# Altium PCB FlyBack.PcbDoc
Units mm, origin at the board's own origin, x right, y up, seen from the top; angles counter-clockwise.
Board outline 100 x 100 mm, 2 copper layers (Top Layer, Bottom Layer); 36 components, 23 nets, 113 pads, 0 vias.
Unrouted connection lines stored in the file: 1.
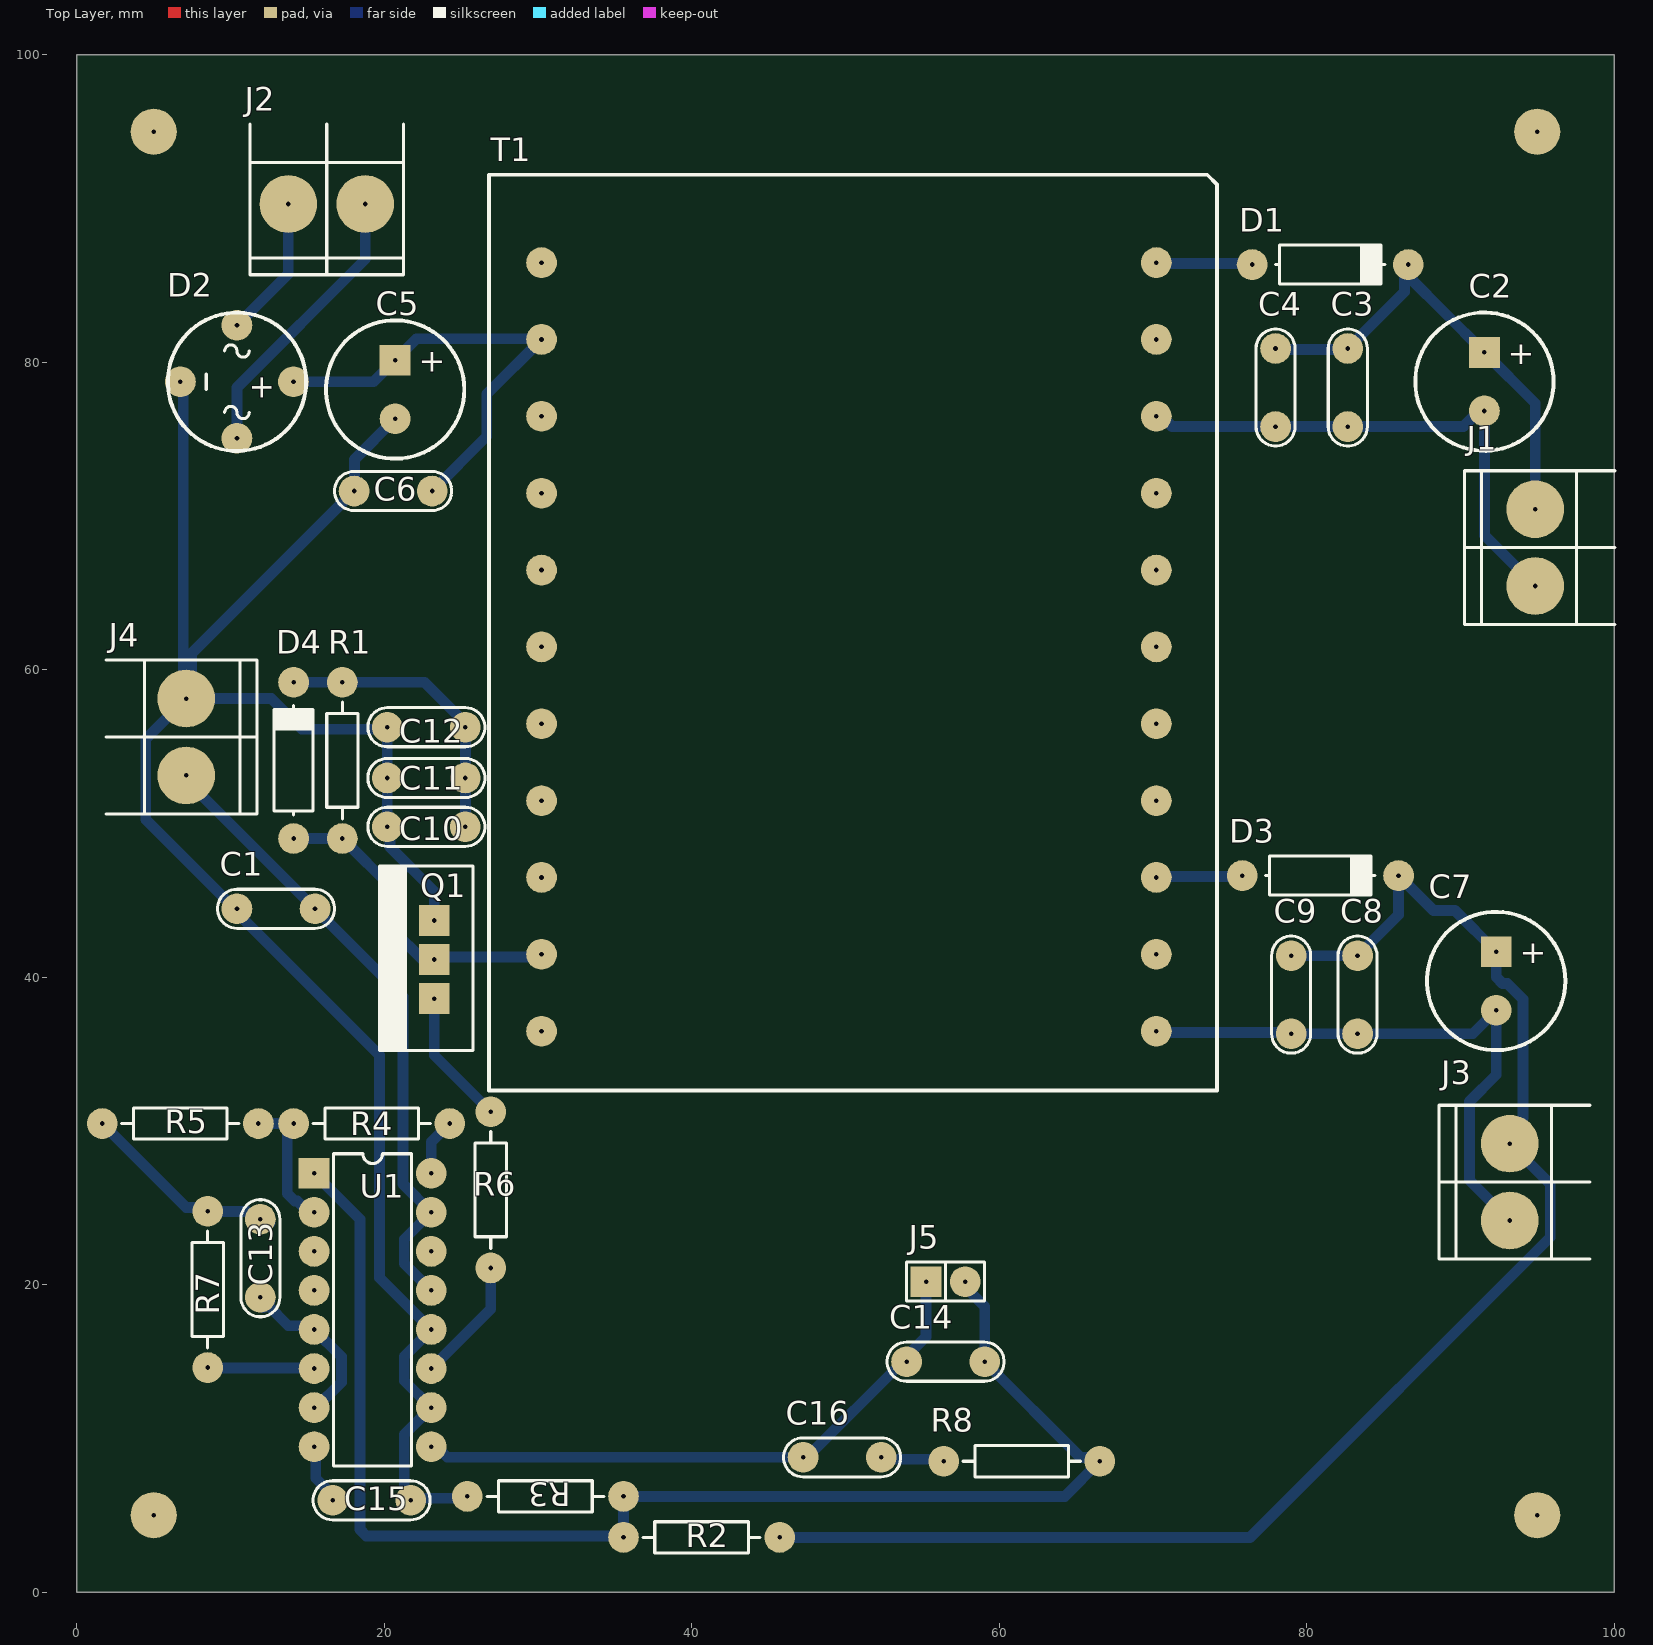
[diagram p0: Top Layer view]
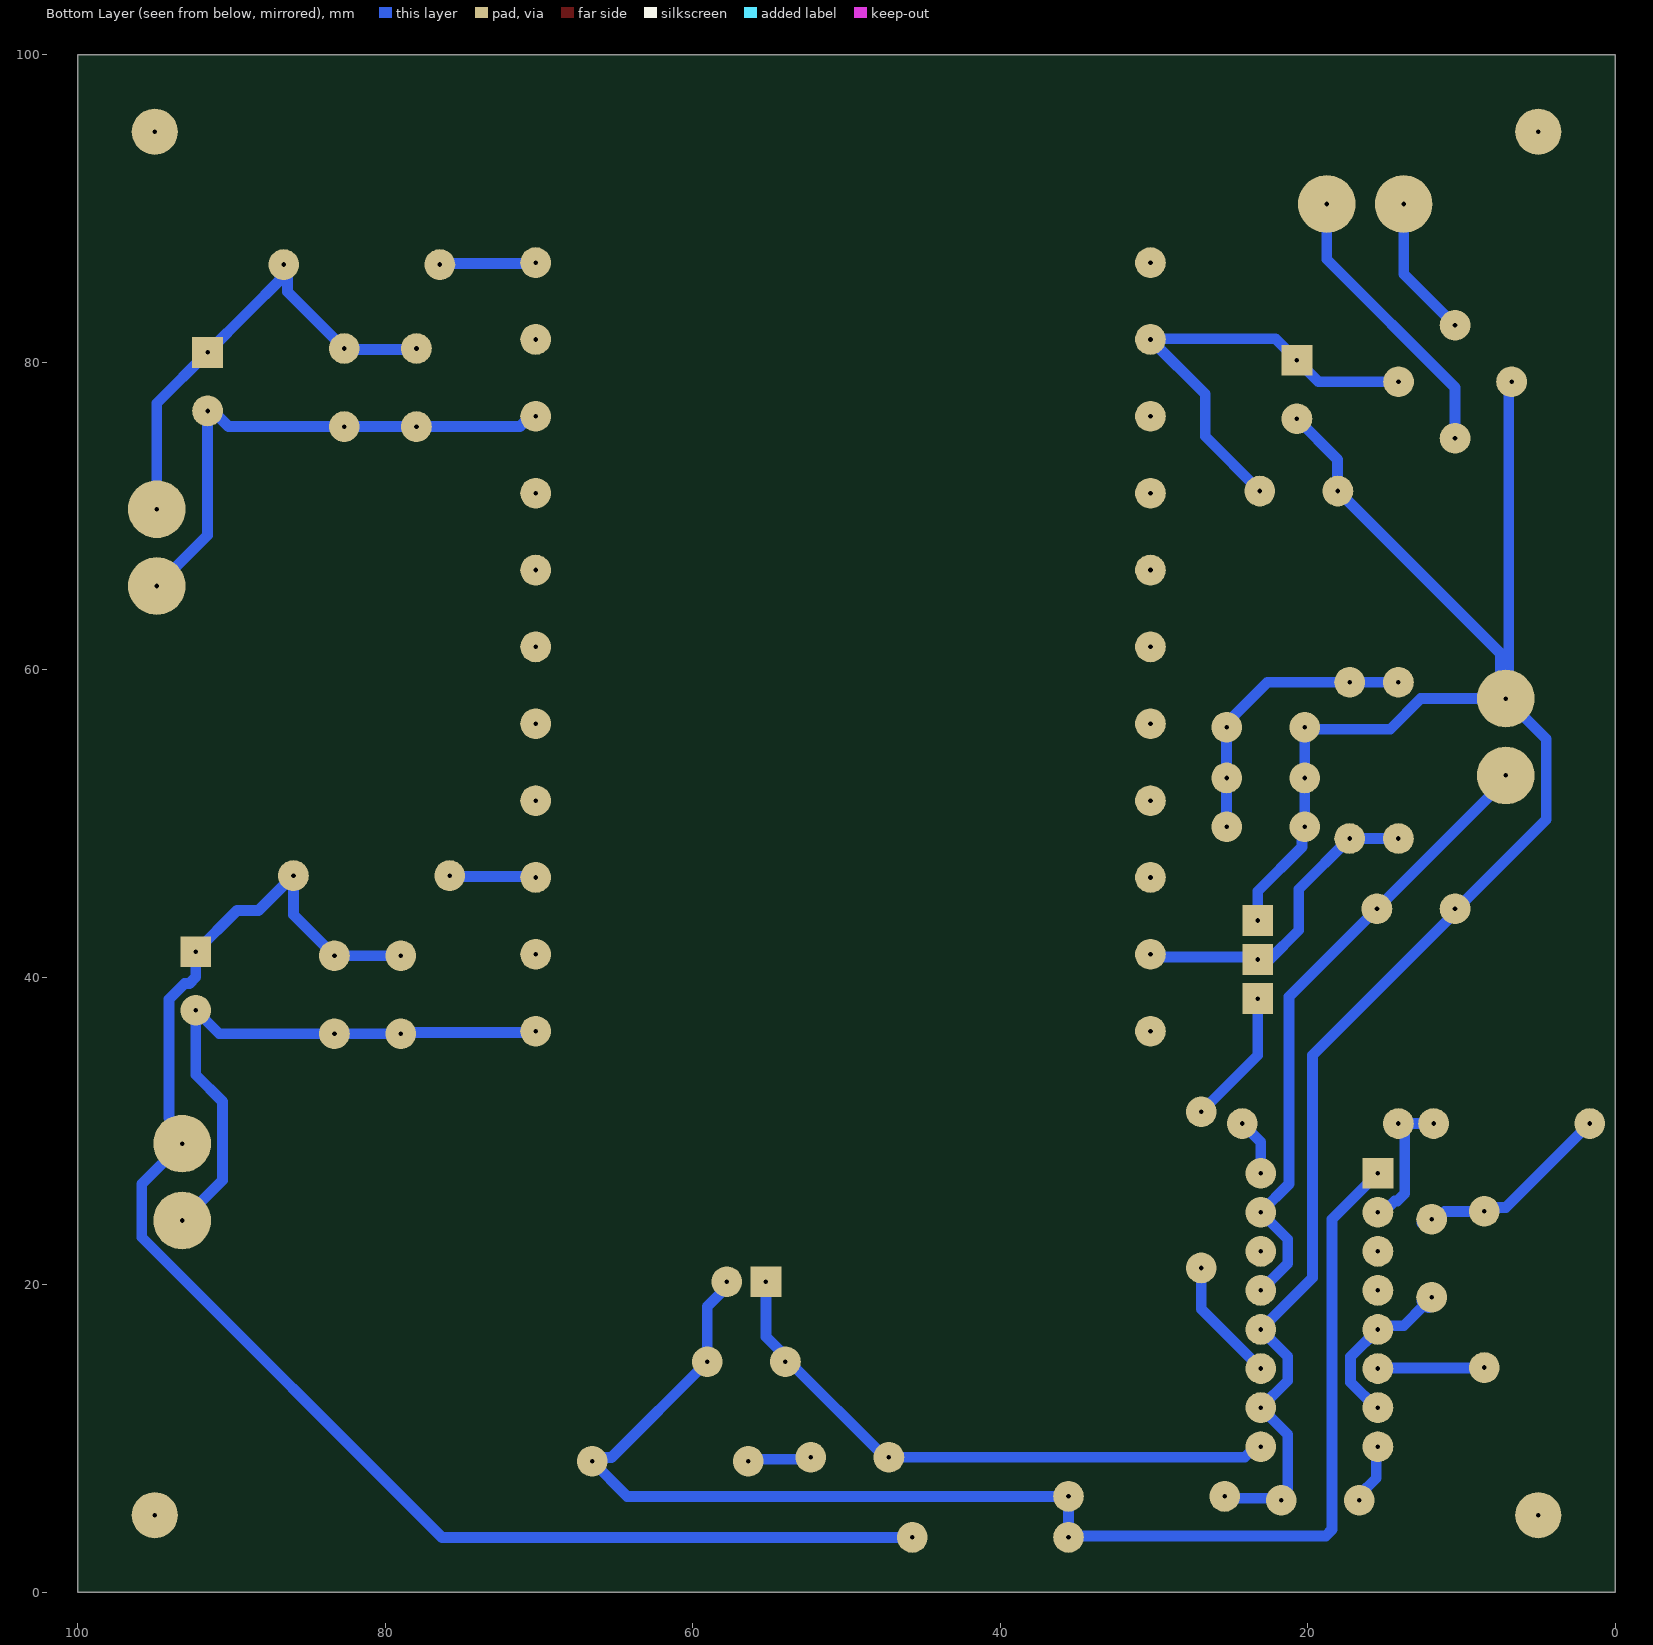
[diagram p1: Bottom Layer view, seen from below]
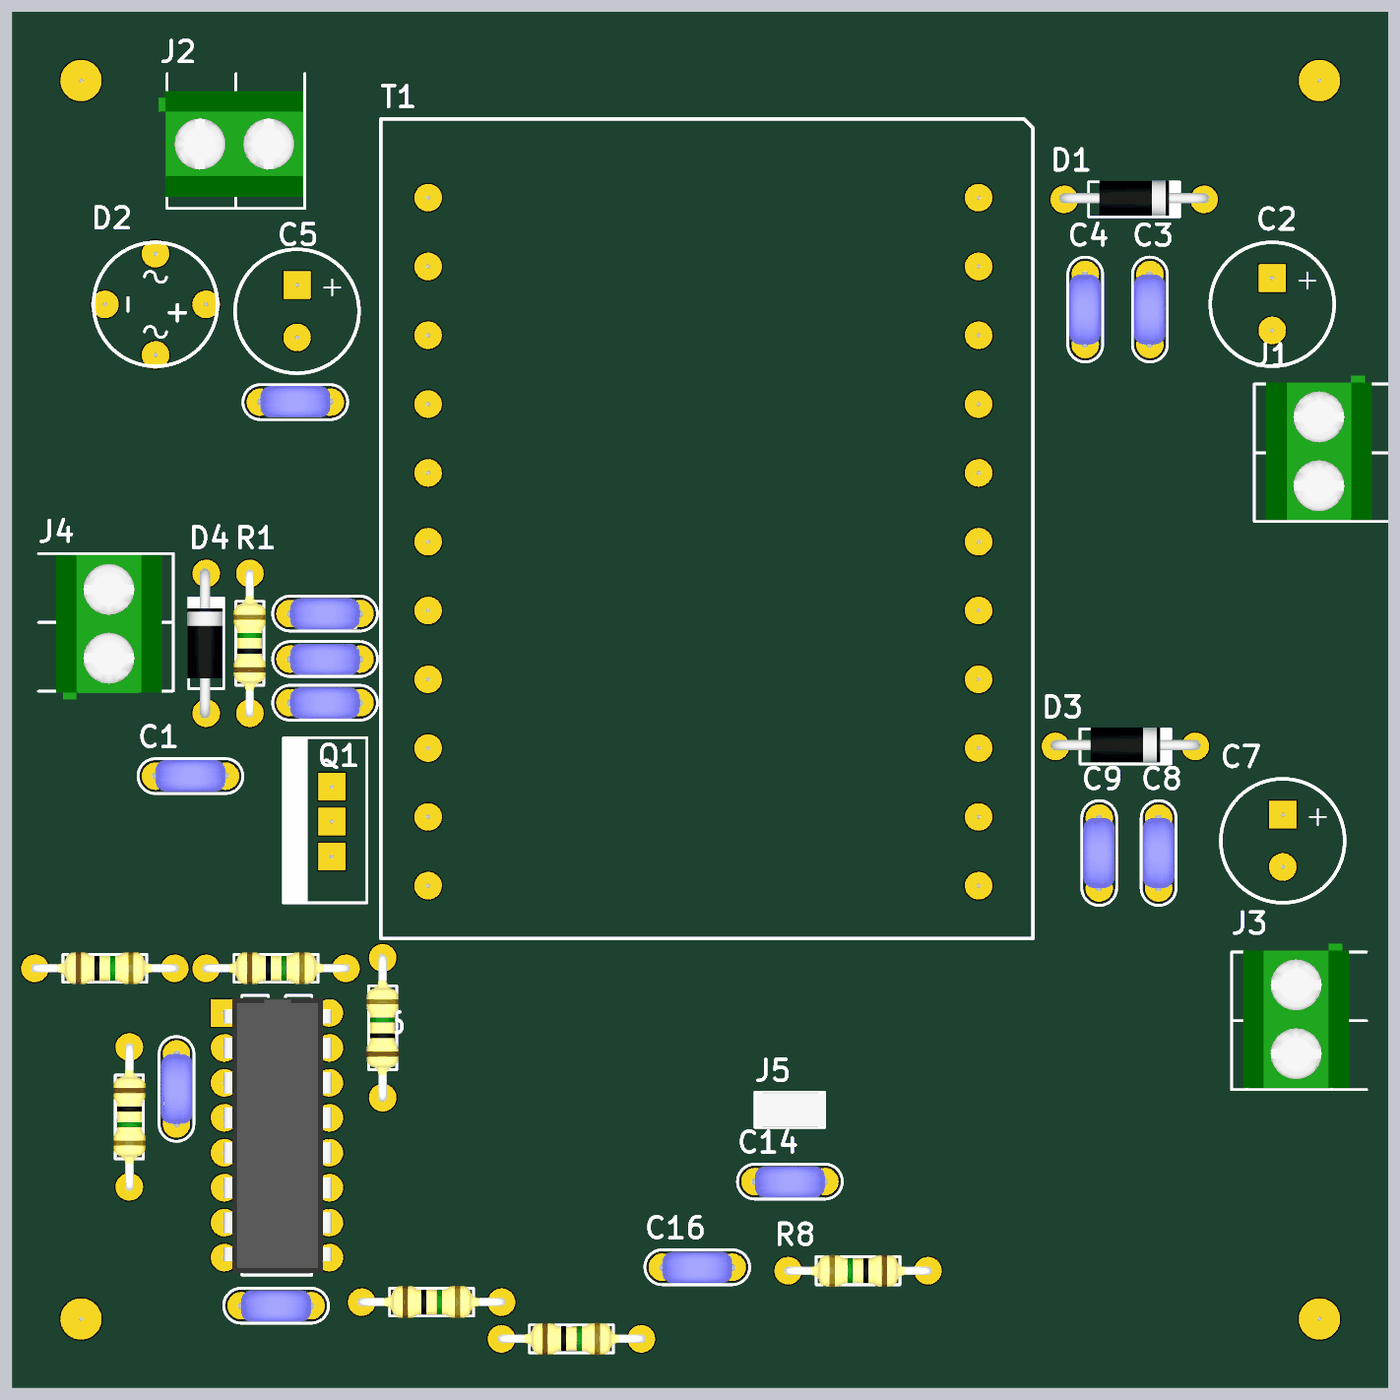
[diagram p2: 3D render of the assembled board from above, using the file's embedded part models]

## Layer stack, top to bottom
Top Solder: solder mask 0.0102, Solder Resist, Dk 3.5
Top Layer: signal copper 0.0356
Dielectric 1: dielectric 0.32, FR-4, Dk 4.8
Bottom Layer: signal copper 0.0356
Bottom Solder: solder mask 0.0102, Solder Resist, Dk 3.5

## Board outline
0,0 100,0 100,100 0,100

## Design rules (kind name [scope] priority, off if disabled: settings)
Clearance [All] p1: gap=0.4 ignorepadtopadclearanceinfootprint=FALSE
PolygonConnect [All] p1: connectstyle=Relief reliefconductorwidth=0.254 reliefentries=4 polygonreliefangle="90 Angle" airgapwidth=0.254
RoutingVias [All] p1: holewidth=0.4 width=2 viastyle="Through Hole" minholewidth=0.3 minwidth=1.5 maxholewidth=0.5 maxwidth=3
SolderMaskExpansion [All] p1: expansion=0.102 istentingtop=FALSE
Width [All] p1: maxlimit=0.9 minlimit=0.6 preferedwidth=0.7
30 further rules are at their usual default settings.

## Components (designator, comment, footprint, x,y, rotation, side; value= is the part's Value field where it differs from the comment)
C1 "CAP" CAP200 12.954,44.45 r180 top
C2 "CAPPOL" CAP300RP 91.567,78.74 r270 top
C3 "CAP" CAP200 82.677,78.359 r270 top
C4 "CAP" CAP200 77.978,78.359 r270 top
C5 "CAPPOL" CAP300RP 20.701,78.232 r270 top
C6 "CAP" CAP200 20.574,71.628 r180 top
C7 "CAPPOL" CAP300RP 92.329,39.751 r270 top
C8 "CAP" CAP200 83.312,38.862 r270 top
C9 "CAP" CAP200 78.994,38.862 r270 top
C10 "CAP" CAP200 22.733,49.784 r0 top
C11 "CAP" CAP200 22.733,52.959 r0 top
C12 "CAP" CAP200 22.733,56.261 r0 top
C13 "CAP" CAP200 11.938,21.717 r90 top
C14 "CAP" CAP200 56.515,14.986 r0 top
C15 "CAP" CAP200 19.177,5.969 r0 top
C16 "CAP" CAP200 49.784,8.763 r0 top
D1 "DIODO" DO41 81.534,86.36 r0 top
D2 "PUENTE" "PUENTE - W10M" 14.091,78.734 r270 top
D3 "DIODO" DO41 80.899,46.609 r0 top
D4 "DIODO" DO41 14.097,54.102 r90 top
J1 "BORNERA 2" BORNERA2 94.869,67.945 r0 top
J2 "BORNERA 2" BORNERA2 16.256,90.297 r90 top
J3 "BORNERA 2" BORNERA2 93.218,26.67 r0 top
J4 "BORNERA 2" BORNERA2 7.112,55.626 r180 top
J5 "JUMPER" JUMPER2 56.515,20.193 r0 top
Q1 "MOSFET N" "TO-220 V" 23.241,41.148 r90 top
R1 "RES" RES400 17.272,49.022 r90 top
R2 "RES" RES400 35.56,3.556 r0 top
R3 "RES" RES400 25.4,6.223 r0 top
R4 "RES" RES400 14.097,30.48 r0 top
R5 "RES" RES400 1.651,30.48 r0 top
R6 "RES" RES400 26.924,21.082 r90 top
R7 "RES" RES400 8.509,24.765 r270 top
R8 "RES" RES400 66.548,8.509 r180 top
T1 "E55/28/21" E55/28/21 30.226,86.487 r0 top
U1 "IC_DIP16" DIP16 15.43,27.241 r0 top

## Footprints (in the part's own frame and the unit in brackets; to place one, negate y for a bottom-side part, rotate by r counter-clockwise, add the part's x,y. Pads: shape width x height; smd on the part's side, far side on the other; paste and mask are expansions set on the pad)
BORNERA2 [mm] "Bornera con Tornillos 5mm separación"
  round 3.75 hole 0.3: 1(0,2.5) 2(0,-2.5)
  silkscreen extent -4.6,-5 5.2,5, body extent -3.76,-4.89 3.94,5.61, height 10
CAP200 [mm]
  round 2 hole 0.3: 1(-2.54,0) 2(2.54,0)
  silkscreen extent -3.81,-1.27 3.81,1.27, body extent -2.79,-1.17 2.79,1.12, height 6.24
CAP300RP [mm]
  rect 2x2 hole 0.3: 1(-1.905,0)
  round 2 hole 0.3: 2(1.905,0)
  silkscreen extent -4.5,-4.5 4.5,4.5
DIP16 [mm]
  rect 2x2 hole 0.3: 1(0,0)
  round 2 hole 0.3: 2(0,-2.54) 3(0,-5.08) 4(0,-7.62) 5(0,-10.16) 6(0,-12.7) 7(0,-15.24) 8(0,-17.78) 9(7.62,-17.78) 10(7.62,-15.24) 11(7.62,-12.7) 12(7.62,-10.16) 13(7.62,-7.62) 14(7.62,-5.08) 15(7.62,-2.54) 16(7.62,0)
  silkscreen extent 1.27,-19.05 6.35,1.27, body extent -0.08,-18.89 7.79,1.11, height 1.98
DO41 [mm]
  round 2 hole 0.3: 1(-5.08,0) 2(5.08,0)
  silkscreen extent -3.56,-1.27 3.56,1.27, body extent -5.46,-1.19 5.46,1.37, height 2.03
E55/28/21 [mm] "Transistor Coil E55/28/21"
  round 2 hole 0.3: 1(0,0) 2(0,-5) 3(0,-10) 4(0,-15) 5(0,-20) 6(0,-25) 7(0,-30) 8(0,-35) 9(0,-40) 10(0,-45) 11(0,-50) 12(40,0) 13(40,-5) 14(40,-10) 15(40,-15) 16(40,-20) 17(40,-25) 18(40,-30) 19(40,-35) 20(40,-40) 21(40,-45) 22(40,-50)
  silkscreen extent -3.43,-53.85 43.94,5.71
JUMPER2 [mm]
  rect 2x2 hole 0.3: 1(-1.27,0)
  round 2 hole 0.3: 2(1.27,0)
  silkscreen extent -2.54,-1.27 2.54,1.27, body extent -2.46,-1.27 2.54,1.27, height 9.5
"PUENTE - W10M" [mm]
  round 2 hole 0.3: 1(0,0) 2(-3.677,-3.677) 3(0,-7.354) 4(3.677,-3.677)
  silkscreen extent -4.5,-8.17 4.5,0.82
RES400 [mm]
  round 2 hole 0.3: 1(0,0) 2(10.16,0)
  silkscreen extent 1.27,-1.02 8.89,1.02, body extent -0.3,-1.14 10.46,1.17, height 2.43
"TO-220 V" [mm]
  rect 2x2 hole 0.3: 1(-2.54,0) 2(0,0) 3(2.54,0)
  silkscreen extent -5.9,-2.54 6.1,3.54, body extent -5,-2 5,3, height 18

## Part data
T1: "Transistor E55/28/21"

## Free pads (board coordinates)
  round 3 hole 0.3: 1(5,5) 1(5,95) 1(95,5) 1(95,95)

## Nets (pads, with @x,y where several pads share a name; then routed paths per layer and width w, separated by ;. In a path a pad name is that pad's centre, name@x,y a point inside that pad or via, vN(x,y) a via of type N, cw(c..) or ccw(c..) an arc to the next point about the centre after c; other vN are vias at no path point)
IGND: C1.2 C5.2 C6.2 C10.1 C11.1 C12.1 C13.2 C15.2 D2.3 J4.2 Q1.3 R3.1 R5.1 R7.1 U1.10 U1.12 | length 152.2
  Bottom Layer w0.7: R5.1 7.117,25.014 8.26,25.014 R7.1 11.078,24.765 11.586,24.257 C13.2 C13.2@11.811,24.13 ; D2.3 6.925,78.546 6.925,58.313 J4.2 ; C13.2@12.509,24.066 C13.2@12.573,24.003 ; C11.1@20.193,52.705 C10.1 20.371,49.606 20.371,48.463 23.241,45.593 Q1.3 ; C11.1 C12.1@20.193,56.007 ; C12.1 20.066,56.134 14.631,56.134 12.639,58.126 7.457,58.126 J4.2 ; C5.2 18.052,73.678 18.052,71.646 C6.2 7.457,61.051 7.457,58.471 J4.2 ; R3.1 25.273,6.096 21.844,6.096 C15.2 21.717,6.321 21.3,6.737 21.3,10.251 U1.10 21.3,13.752 21.3,15.331 U1.12 19.685,20.447 19.685,34.925 10.414,44.196 C1.2 10.287,44.45 4.487,50.25 4.487,55.501 J4.2
NetC5_1: C5.1 C6.1 D2.1 T1.2 | length 30.1
  Bottom Layer w0.7: D2.1 19.298,78.734 C5.1 22.098,81.534 30.179,81.534 T1.2 26.67,77.931 26.67,75.184 C6.1
NetC10_2: C10.2 C11.2 C12.2 D4.2 R1.2 | length 18.9
  Bottom Layer w0.7: D4.2 R1.2 22.606,59.182 25.273,56.515 C12.2 ; C10.2 C11.2@25.273,52.705 ; C11.2 C12.2@25.273,56.007 ; C12.2@25.273,55.88 C12.2@25.273,56.232
NetC13_1: C13.1 U1.5 U1.7 | length 11.5
  Bottom Layer w0.7: C13.1@11.938,18.955 C13.1 ; C13.1@12.148,18.498 12.148,18.84 12.065,18.923 C13.1@12.573,18.923 ; C13.1@12.414,18.669 13.752,17.33 15.182,17.33 U1.5 17.209,15.303 17.209,13.652 15.557,12.002 U1.7
NetC15_1: C15.1 U1.8 | length 4
  Bottom Layer w0.7: U1.8@15.399,9.43 U1.8 15.546,9.346 15.546,7.411 16.637,6.321 C15.1
NetC16_2: C16.2 R8.2 | length 4.2
  Bottom Layer w0.7: C16.2 52.451,8.636 56.261,8.636 R8.2
NetD1_1: D1.1 T1.12 | length 6.8
  Bottom Layer w0.7: T1.12@70.416,86.677 T1.12 70.289,86.423 76.391,86.423 D1.1 D1.1@76.263,86.169
NetD3_1: D3.1 T1.20 | length 5.6
  Bottom Layer w0.7: T1.20 70.287,46.548 75.758,46.548 D3.1
NetD4_1: D4.1 Q1.2 R1.1 T1.10 | length 22
  Bottom Layer w0.7: D4.1 R1.1 20.574,45.72 20.574,43.053 22.479,41.148 Q1.2 ; Q1.2@22.591,41.798 Q1.2 ; T1.10 30.057,41.317 23.41,41.317 Q1.2
NetQ1_1: Q1.1 R6.2 | length 8.9
  Bottom Layer w0.7: Q1.1 23.241,34.925 R6.2
NetR4_1: R4.1 R5.2 U1.2 | length 9.6
  Bottom Layer w0.7: R5.2@11.874,30.416 R5.2 R4.1 14.097,30.128 13.68,29.712 13.68,25.931 14.166,25.445 14.335,25.445 15.079,24.701 U1.2 U1.2@15.272,24.543
NetR4_2: R4.2 U1.16 | length 4.1
  Bottom Layer w0.7: U1.16 23.05,29.273 R4.2 R4.2@24.257,30.128
NetR7_2: R7.2 U1.6 | length 7.1
  Bottom Layer w0.7: R7.2@8.445,14.541 R7.2 8.541,14.573 15.399,14.573 U1.6 U1.6@15.367,14.478
O1GND: C2.2 C3.2 C4.2 J1.2 T1.14 | length 34.8
  Bottom Layer w0.7: T1.14 70.578,76.487 71.246,75.819 C4.2 C3.2 90.199,75.819 91.215,76.835 C2.2 91.567,68.747 J1.2
O2GND: C7.2 C8.2 C9.2 J3.2 T1.22 | length 38.3
  Bottom Layer w0.7: T1.22 70.308,36.404 78.912,36.404 C9.2 C8.2 90.805,36.322 C7.2 92.329,33.656 90.593,31.92 90.593,26.795 J3.2
VCC: C1.1 J4.1 U1.13 U1.15 | length 41.6
  Bottom Layer w0.7: J4.1 7.112,52.832 21.209,38.735 21.209,26.543 U1.15 21.3,22.951 21.3,21.372 U1.13
VComp: C14.1 C16.1 J5.1 U1.9 | length 39.5
  Bottom Layer w0.7: U1.9 23.402,9.461 24.101,8.763 C16.1 47.498,8.763 53.721,14.986 C14.1 53.975,15.338 55.245,16.608 J5.1
VControl: R6.1 U1.11 | length 8.1
  Bottom Layer w0.7: U1.11 26.924,18.415 R6.1
"VIN 220V F": D2.2 J2.1 | length 9.3
  Bottom Layer w0.7: D2.2 13.756,85.753 J2.1
"VIN 220V N": D2.4 J2.2 | length 19.5
  Bottom Layer w0.7: D2.4 10.414,78.359 18.756,86.701 J2.2 J2.2@18.172,89.713
Vout1: C2.1 C3.1 C4.1 D1.2 J1.1 | length 31.1
  Bottom Layer w0.7: C4.1@78.041,80.835 82.614,80.835 C3.1 86.365,84.587 86.365,86.111 D1.2 86.863,86.111 86.863,85.349 88.89,83.322 C2.1 94.869,77.343 J1.1
VOut2: C7.1 C8.1 C9.1 D3.2 J3.1 R2.2 | length 98.5
  Bottom Layer w0.7: R2.2@45.593,3.81 45.72,3.683 R2.2 76.316,3.556 95.843,23.083 95.843,26.545 J3.1 93.218,29.995 94.079,30.856 94.079,38.571 93.054,39.596 92.739,39.596 92.329,40.006 C7.1 89.652,44.333 88.255,44.333 D3.2 85.979,44.069 C8.1 C9.1
Vreal: C14.2 J5.2 R2.1 R3.2 R8.1 U1.1 | length 92.1
  Bottom Layer w0.7: U1.1 18.415,24.257 18.415,4.062 18.825,3.652 R2.1@35.433,3.652 ; R2.1 R3.2 64.262,6.223 R8.1 66.299,8.758 65.283,8.758 C14.2 59.055,18.571 57.785,19.841 J5.2
pads on no net: T1.1 T1.3 T1.4 T1.5 T1.6 T1.7 T1.8 T1.9 T1.11 T1.13 T1.15 T1.16 T1.17 T1.18 T1.19 T1.21 U1.3 U1.4 U1.14

## Text inside footprints (layer, text, board x,y; h text height)
C2: Top Overlay "+" at 93.091,79.883 h1.52
C5: Top Overlay "+" at 22.225,79.375 h1.52
C7: Top Overlay "+" at 93.853,40.894 h1.52
D2: Top Overlay "+" at 11.414,79.234 h1.52 r270